# Altium PCB ELECTRONIC LOAD.PcbDoc
Units mil, origin at the board's own origin, x right, y up, seen from the top; angles counter-clockwise.
Board outline 2325 x 1595 mil, 2 copper layers (Top Layer, Bottom Layer); 45 components, 30 nets, 137 pads, 25 vias.
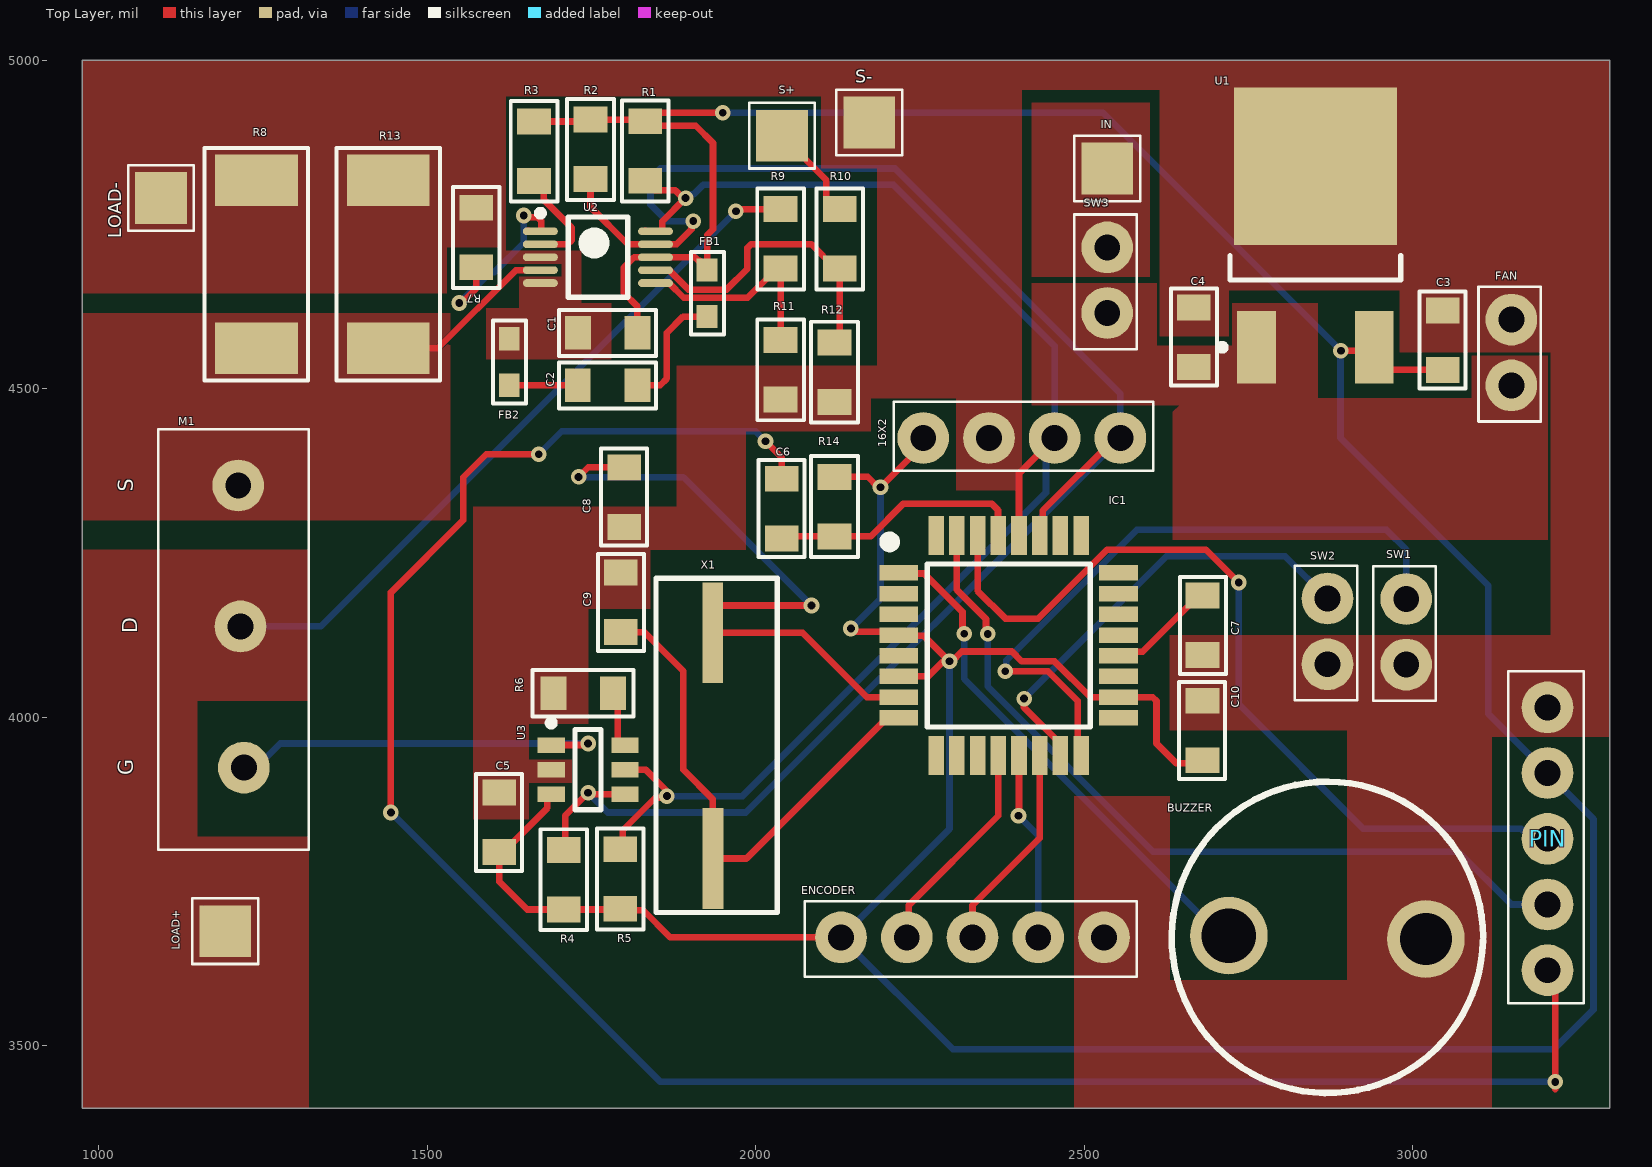
[diagram p0: Top Layer view]
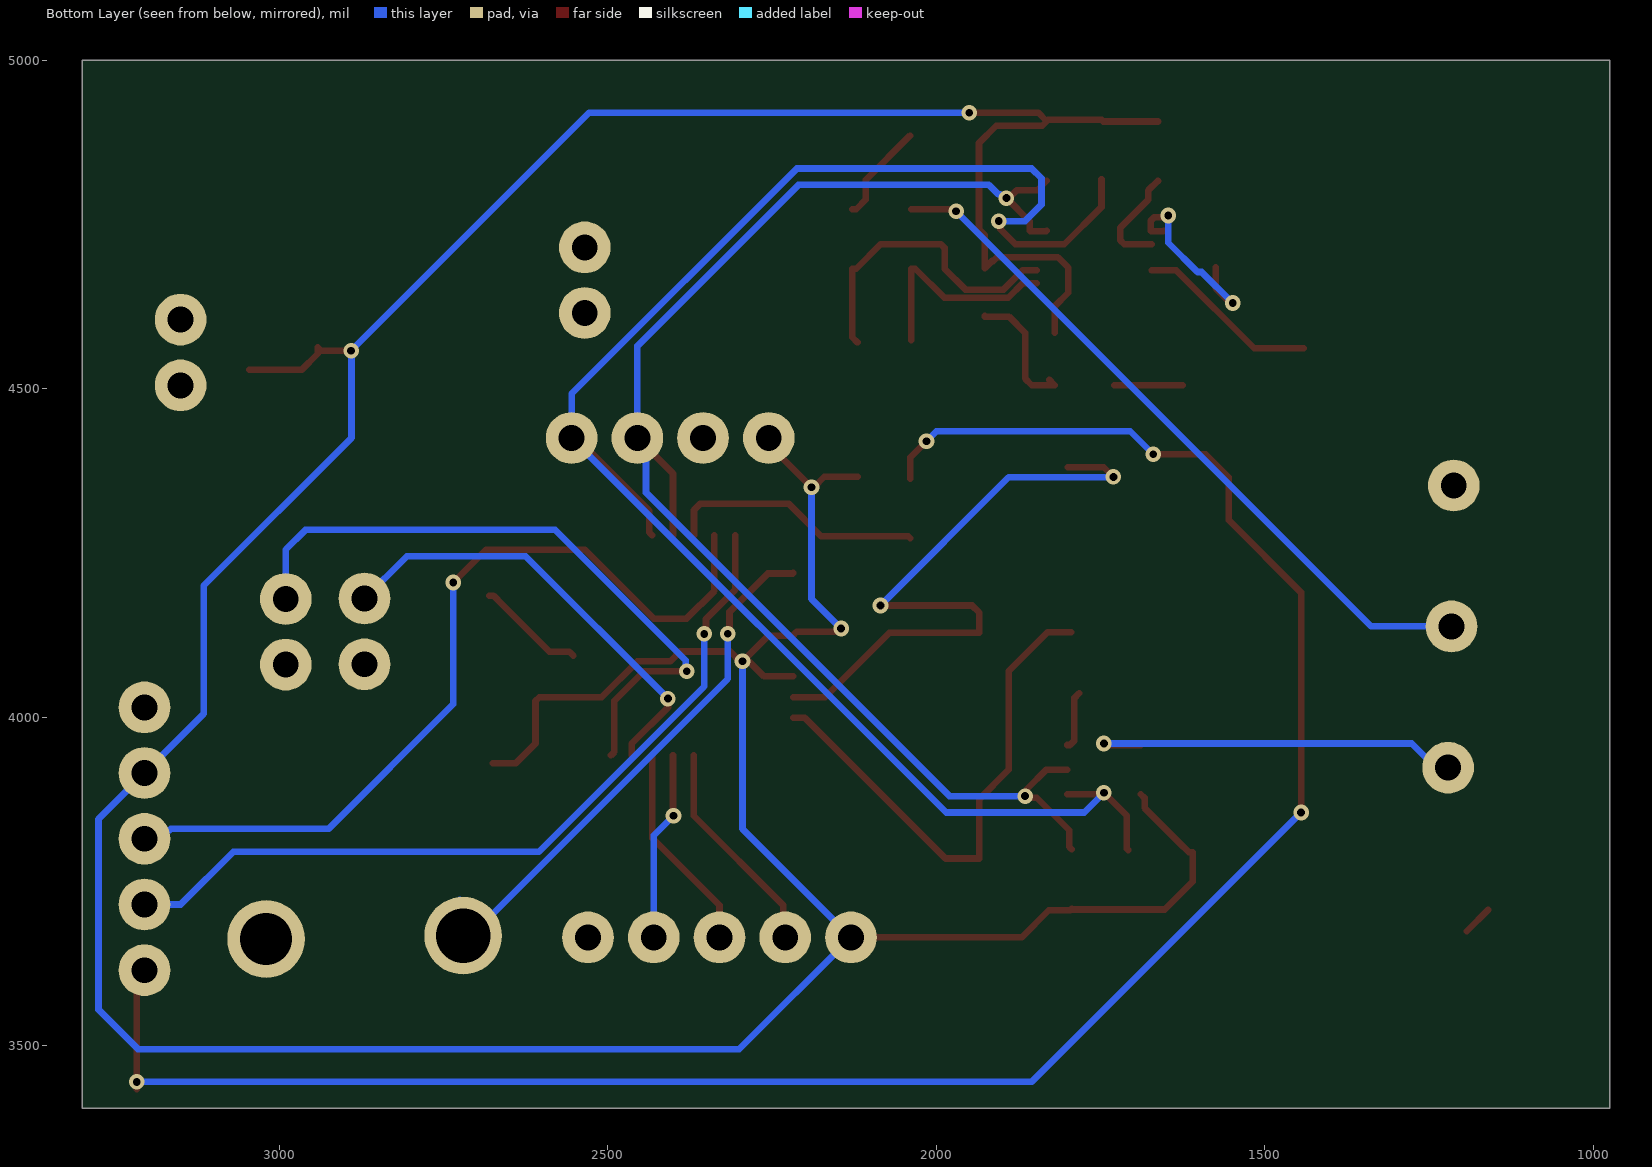
[diagram p1: Bottom Layer view, seen from below]
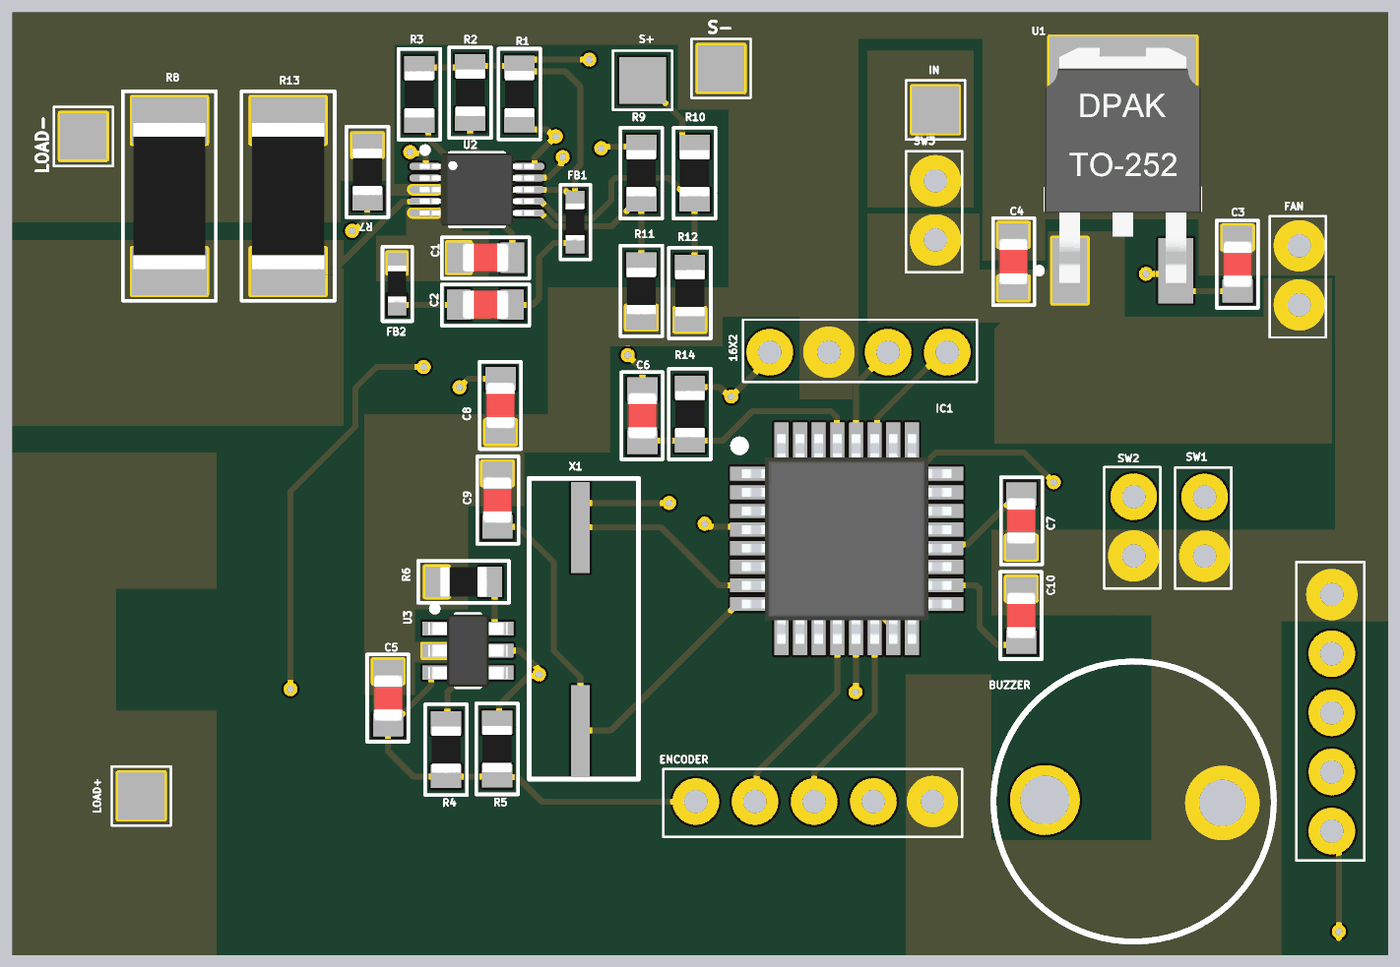
[diagram p2: 3D render of the assembled board from above, using the file's embedded part models]

## Layer stack, top to bottom
Top Solder: solder mask 0.4, Solder Resist, Dk 3.5
Top Layer: signal copper 1.4
Dielectric 1: dielectric 12.6, FR-4, Dk 4.8
Bottom Layer: signal copper 1.4
Bottom Solder: solder mask 0.4, Solder Resist, Dk 3.5

## Board outline
975,3405 975,5000 3300,5000 3300,3405

## Design rules (kind name [scope] priority, off if disabled: settings)
Clearance [All] p1: gap=0.1 ignorepadtopadclearanceinfootprint=FALSE
PolygonConnect [All] p1: connectstyle=Direct reliefconductorwidth=10 reliefentries=4 polygonreliefangle="90 Angle" airgapwidth=10
RoutingVias [All] p1: holewidth=28 width=50 viastyle="Through Hole" minholewidth=28 minwidth=50 maxholewidth=28 maxwidth=50
SolderMaskExpansion [All] p1: expansion=4 istentingtop=FALSE
Width [All] p1: maxlimit=10 minlimit=10 preferedwidth=10
30 further rules are at their usual default settings.

## Components (designator, comment, footprint, x,y, rotation, side; value= is the part's Value field where it differs from the comment)
16X2 "16X2" 4PIN 2415,4425 r270 top
BUZZER "BUZZER" BUZZER 2870,3665 r0 top
C1 "1UF" C-0805W 1774.72,4585 r0 top
C2 "1UF" C-0805W 1774.67,4505.26 r0 top
C3 "1UF" C-0805W 3045.72,4573.82 r270 top
C4 "1UF" C-0805W 2666.78,4578.26 r90 top
C5 "1UF" C-0805W 1610,3840 r270 top
C6 "100N" C-0805W 2039.76,4317.5 r270 top
C7 "100N" C-0805W 2680,4139.72 r90 top
C8 "16PF" C-0805W 1800,4335 r270 top
C9 "16PF" C-0805W 1794.74,4174.87 r90 top
C10 "100N" C-0805W 2680,3979.72 r270 top
ENCODER "ENCODER" 5PIN 2395,3660 r90 top
FAN "SWITCH" 2PIN 3150,4555 r0 top
FB1 "FB" R-0603W 1926.09,4645.11 r90 top
FB2 "FB" R-0603W 1625,4540.43 r90 top
IC1 "ATMEGA328-AUR" ATMEGA328 2390,4125 r0 top
IN "PAD" PAD 2535,4835 r180 top
LOAD+ "PAD" PAD 1192.86,3674.4 r180 top
LOAD- "PAD" PAD 1095,4790 r180 top
M1 "IRFP064NPBF" TO247 -42488.78,47748.2 r180 top
PIN "PIN" 5PIN 3200,3750 r0 top
R1 "10K" R-0805W 1831.93,4861.68 r90 top
R2 "10K" R-0805W 1748.69,4864.03 r90 top
R3 "10K" R-0805W 1662.76,4861.26 r90 top
R4 "10K" R-0805W 1707.89,3752.7 r270 top
R5 "10K" R-0805W 1794.17,3753.83 r270 top
R6 "10K" R-0805W 1737.53,4036.51 r0 top
R7 "10K" R-0805W 1575,4730 r270 top
R8 "2512W" R-2512W 1240.27,4689.26 r90 top
R9 "100K" R-0805W 2037.9,4727.83 r90 top
R10 "100K" R-0805W 2127.9,4727.83 r90 top
R11 "10K" R-0805W 2037.9,4528.69 r90 top
R12 "10K" R-0805W 2120,4525 r90 top
R13 "2512W" R-2512W 1440.93,4689.26 r90 top
R14 "10K" R-0805W 2120,4320.49 r90 top
S+ "PAD" PAD 2040,4885 r270 top
S- "PAD" PAD 2172.82,4905 r270 top
SW1 "SWITCH" 2PIN 2990,4130 r0 top
SW2 "SWITCH" 2PIN 2870.2,4130.53 r0 top
SW3 "SWITCH" 2PIN 2535,4665 r0 top
U1 "LM7805" TO-252 2851.78,4720.43 r90 top
U2 "ADS1115" ADS1115 1760,4700 r0 top
U3 "MCP4725" sot23-6 1745,3920.26 r0 top
X1 "16MHZ" "16MHZ CRYSTAL" 1935.16,3957.52 r270 top

## Footprints (in the part's own frame and the unit in brackets; to place one, negate y for a bottom-side part, rotate by r counter-clockwise, add the part's x,y. Pads: shape width x height; smd on the part's side, far side on the other; paste and mask are expansions set on the pad)
2PIN [mm]
  round 2 hole 1: 1(0,-1.27) 2(0,1.27)
  silkscreen extent -1.27,-2.67 1.14,2.54
4PIN [mm]
  round 2 hole 1: 1(0,-4.064) 2(0,-1.524) 3(0,1.016) 4(0,3.556)
  silkscreen extent -1.4,-5.21 1.27,4.83
5PIN [mm]
  round 2 hole 1: 1(0.127,-3.429) 2(0.127,-0.889) 3(0.127,1.651) 4(0.127,4.191) 5(0.127,6.731)
  silkscreen extent -1.4,-4.7 1.52,8.13
"16MHZ CRYSTAL" [mm]
  rect 3.9x0.8 smd: 1(-4.344,-0.008) 2(4.382,-0.004)
  silkscreen extent -6.45,-2.2 6.47,2.48
ADS1115 [mm] "TSSOP, 10-Leads, Body 3,00x3,00mm, Pitch 0,50mm, IPC Medium Density"
  oval 1.35x0.3 smd: 1(-2.225,1) 2(-2.225,0.5) 3(-2.225,0) 4(-2.225,-0.5) 5(-2.225,-1) 6(2.225,-1) 7(2.225,-0.5) 8(2.225,0) 9(2.225,0.5) 10(2.225,1)
  silkscreen extent -2.35,-1.55 1.15,1.82, body extent -2.45,-1.55 2.45,1.55, height 1.1
ATMEGA328 [mm]
  rect 1.5x0.6 smd: 1(-4.377,2.4) 2(-4.377,1.6) 3(-4.377,0.8) 4(-4.377,0) 5(-4.377,-0.8) 6(-4.377,-1.6) 7(-4.377,-2.4) 8(-4.377,-3.2) 17(4.123,-3.2) 18(4.123,-2.4) 19(4.123,-1.6) 20(4.123,-0.8) 21(4.123,0) 22(4.123,0.8) 23(4.123,1.6) 24(4.123,2.4)
  rect 0.6x1.5 smd: 9(-2.927,-4.65) 10(-2.127,-4.65) 11(-1.327,-4.65) 12(-0.527,-4.65) 13(0.273,-4.65) 14(1.073,-4.65) 15(1.873,-4.65) 16(2.673,-4.65) 25(2.673,3.85) 26(1.873,3.85) 27(1.073,3.85) 28(0.273,3.85) 29(-0.527,3.85) 30(-1.327,3.85) 31(-2.127,3.85) 32(-2.927,3.85)
  silkscreen extent -4.93,-3.55 3.02,3.8, body extent -4.63,-4.9 4.37,4.1, height 1.2
BUZZER [mm]
  round 3 hole 2.1: 1(-3.81,0.064)
  round 3 hole 2: 2(3.81,-0.064)
  silkscreen extent -6.02,-6.02 6.02,6.02
C-0805W [mm] "capacitor 0805 wave soldering"
  rect 1x1.3 smd: 1(-1.15,0) 2(1.15,0)
  silkscreen extent -1.88,-0.9 1.88,0.87, body extent -1,-0.63 1,0.63, height 0.78
PAD [mm]
  rect 2x2 smd: 1(0,0)
  silkscreen extent -1.27,-1.27 1.27,1.27
R-0603W [mm] "resistor 0603 wave soldering"
  rect 0.9x0.8 smd: 1(-0.9,0) 2(0.9,0)
  silkscreen extent -1.6,-0.65 1.6,0.63, body extent -0.8,-0.4 0.8,0.4, height 0.45
R-0805W [mm] "resistor 0805 wave soldering"
  rect 1x1.3 smd: 1(-1.15,0) 2(1.15,0)
  silkscreen extent -1.95,-0.9 1.95,0.9, body extent -1,-0.62 1,0.63, height 0.5
R-2512W [mm] "resistor 2512 wave soldering"
  rect 2x3.2 smd: 1(-3.25,0) 2(3.25,0)
  silkscreen extent -4.5,-2 4.5,2, body extent -3.15,-1.55 3.15,1.55, height 0.55
sot23-6 [mm] "SOT23, 6-Leads, Body 2,90x2,70mm, Pitch 0,95mm, IPC Medium Density"
  rect 1.05x0.6 smd: 1(-1.425,0.95) 2(-1.425,0) 3(-1.425,-0.95) 4(1.425,-0.95) 5(1.425,0) 6(1.425,0.95)
  silkscreen extent -1.55,-1.55 0.5,1.92, body extent -1.7,-1.55 1.7,1.55, height 1.45
TO247 [mm]
  round 2 hole 1: 1(-1110.234,1113.155) 2(-1110.107,1107.694) 3(-1110.016,1102.244)
  silkscreen extent -1112.74,1100.07 -1106.93,1116.33
TO-252 [mm]
  rect 2.8x1.5 smd: 1(-4,2.275) 3(-4,-2.275)
  rect 6.1x6.3 smd: 2(3,0)
  silkscreen extent -4.12,-3.3 -0.45,3.72, body extent -4.52,-3.37 5.58,3.37, height 2.41

## Part data
16X2: library part 4PIN
BUZZER: "YX-YT12075-YT03D"
C1 C2 C3 C4 C5: library part "1UF CAPACITOR", "0603 CAPACITOR"
C6 C7 C10: library part "100N CAPACITOR"
ENCODER: library part 5PIN
FAN SW1 SW2 SW3: library part 2PIN
FB1 FB2: library part LCB1608-152Y-N
IC1: Manufacturer_Name=Microchip, Mouser Part Number=556-ATMEGA328-AUR, Arrow Part Number=ATMEGA328-AUR, Arrow Price/Stock=https://www.arrow.com/en/products/atmega328-aur/microchip-technology, Datasheet Link=https://componentsearchengine.com/Datasheets/1/ATMEGA328-AUR.pdf, Height=1.2mm, Manufacturer_Part_Number=ATMEGA328-AUR, Mouser Price/Stock=https://www.mouser.co.uk/ProductDetail/Microchip-Technology-Atmel/ATMEGA328-AUR/?qs=lwdSMh1%2FoYLfe%252B5OKFEFrw%3D%3D
M1: "TO247"
PIN: library part PIN5
R1 R2 R3 R4 R5 R6 R7 R11 R12 R14: library part "10K RESISTOR"
R8 R13: library part "2512W RESISTOR"
U3: "SOT23-6"

## Via types
v1: diameter 23.62, hole 11.81, Top Layer to Bottom Layer, 25 vias

## Nets (pads, with @x,y where several pads share a name; then routed paths per layer and width w, separated by ;. In a path a pad name is that pad's centre, name@x,y a point inside that pad or via, vN(x,y) a via of type N, cw(c..) or ccw(c..) an arc to the next point about the centre after c; other vN are vias at no path point)
5V: 16X2.1 C1.2 C3.2 C5.2 C10.2 ENCODER.5 FB1.2 IC1.4 IC1.6 IC1.18 PIN.4 R1.2 R2.2 R3.2 R4.2 R5.2 R14.2 U1.3 U2.8 U3.3 | length 6902.3
  Top Layer w10: R3.2 1745.92,4906.54 R2.2 1829.57,4909.31 R1.2 ; U3.3 1683.09,3877.05 1683.09,3861.91 1630.59,3809.41 1615.91,3794.72 C5.2 1610,3750 1652.57,3707.43 R4.2 1793.04,3707.43 R5.2 1796.61,3706.1 1828.9,3706.1 1870,3665 ENCODER.5 ; C1.2 1820,4625 1799.14,4645.86 1799.14,4684.14 1815,4700 1907.61,4700 1913.37,4694.24 1915.34,4694.24 1926.09,4683.49 1926.09,4733.52 1935.1,4742.53 1935.1,4873.8 1908.9,4900 1838.88,4900 R1.2 ; v1(1950,4920) 1844.98,4920 R1.2 ; R14.2 2170.55,4365.77 2186.31,4350 v1(2190,4350) 2255,4415 16X2.1 ; v1(2145,4135) 2150,4130 2212.68,4130 2219.02,4123.65 2256.35,4123.65 v1(2295,4085) ; IC1.6 2262.2,4062.01 2285.2,4085 v1(2295,4085) ; C10.2@2674.99,3929.73 2640.27,3929.73 2610,3960 2610,4024.65 2604.14,4030.51 IC1.18 2509.49,4030.51 2455,4085 2405,4085 2390,4100 2313.69,4100 2298.69,4085 v1(2295,4085) ; v1(2890.72,4557.63) 2936.03,4557.63 U1.3 2941.35,4553.07 2965.88,4528.54 C3.2
  Bottom Layer w10: v1(1950,4920) 2528.35,4920 v1(2890.72,4557.63) 2890,4556.9 2890,4425 3115,4200 3115,4005 PIN.4 3275,3845 3275,3555 3215,3495 2300,3495 ENCODER.5 2295,3830 v1(2295,4085) ; v1(2145,4135) 2190,4180 v1(2190,4350)
12V: C4.1 FAN.1 SW3.1 U1.1
GND: 16X2.2 BUZZER.2 C1.1 C3.1 C4.2 C5.1 C7.1 C8.2 C9.2 C10.1 ENCODER.1 FAN.2 FB2.2 LOAD-.1 PIN.5 R6.1 R7.1 R8.2 R11.1 R12.1 R13.2 S-.1 SW1.1 SW2.1 U1.2 U2.3 U2.5 U3.2
Net16X2_3: 16X2.3 IC1.28 R1.1 R5.1 U2.10 U3.5 | length 2206.7
  Top Layer w10: R5.1 1797.78,3802.71 1797.78,3827.93 1847.24,3877.39 1862.39,3877.39 v1(1865,3880) 1862.39,3882.61 1862.39,3890.33 1832.46,3920.26 U3.5 ; U2.10@1831.93,4740.21 1832.76,4739.37 1856.89,4739.37 1857.73,4740.21 1857.73,4754.42 v1(1893.33,4790.02) 1889.64,4790.02 1877.94,4801.71 1846.61,4801.71 R1.1 ; IC1.28 2400.75,4370.75 16X2.3
  Bottom Layer w10: v1(1865,3880) 1980,3880 2441.85,4341.85 2441.85,4411.85 16X2.3 2455,4565 2210,4810 1920,4810 1905.63,4795.63 1902.63,4795.63 1897.01,4790.02 v1(1893.33,4790.02)
Net16X2_4: 16X2.4 IC1.27 R2.1 R4.1 U2.9 U3.4 | length 2710
  Top Layer w10: R4.1 1710,3800.09 1710,3850 v1(1745,3885) 1747.14,3882.86 U3.4 ; R2.1 1748.69,4776.31 1805.31,4719.69 U2.9 1847.94,4720.03 1880.03,4720.03 1902.39,4742.39 1902.39,4752.39 v1(1905,4755) ; IC1.27 2436.92,4281.26 2436.92,4314.45 2547.48,4425 16X2.4
  Bottom Layer w10: v1(1745,3885) 1775,3855 1985,3855 16X2.4 2555,4492.12 2212.12,4835 1855,4835 1840,4820 1840,4780 1865,4755 v1(1905,4755)
NetBUZZER_1: BUZZER.1 IC1.1 | length 858.7
  Top Layer w10: IC1.1 2218.51,4218.65 2256.35,4218.65 2314.74,4160.26 2314.74,4129.57 v1(2317.35,4126.96)
  Bottom Layer w10: v1(2317.35,4126.96) 2317.35,4058.37 2708.22,3667.5 BUZZER.1 ; BUZZER.1@2720,3655 2725,3660 BUZZER.1@2725,3722.5
NetC2_1: C2.1 FB2.1 | length 104.5
  Top Layer w10: FB2.1 1625.26,4505.26 C2.1
NetC2_2: C2.2 FB1.1 | length 203.5
  Top Layer w10: C2.2@1828.45,4513.77 C2.2 1854.74,4505.26 1865,4515.52 1865,4585 1889.67,4609.67 FB1.1@1925.1,4609.67 ; FB1.1 FB1.1@1925.1,4609.67 ; FB1.1@1926.09,4610.66 FB1.1@1925.1,4609.67
NetC6_1: C6.1 PIN.1 | length 3245.8
  Top Layer w10: v1(1445,3855) 1445,4190 1555,4300 1555,4365 1590,4400 v1(1670,4400) ; v1(2015,4420) 2039.76,4395.24 C6.1 ; PIN.1 3216.95,3603.05 v1(3216.95,3445) v1@3216.95,3434.14
  Bottom Layer w10: v1(1445,3855) 1855,3445 v1(3216.95,3445) ; v1(1670,4400) 1705,4435 2000,4435 v1(2015,4420)
NetC6_2: C6.2 IC1.29 R14.1 | length 393.8
  Top Layer w10: C6.2 2042.75,4275.22 R14.1 2175.22,4275.22 2225,4325 2358.99,4325 2368.75,4315.24 2368.75,4277.08 IC1.29
NetC7_2: C7.2 IC1.20 | length 165.6
  Top Layer w10: IC1.20 2558.46,4099.64 2588.74,4099.64 2659.41,4170.31 2674.09,4185 C7.2
NetC8_1: C8.1 IC1.7 X1.1 | length 1019.6
  Top Layer w10: v1(1730.59,4365.59) 1745.28,4380.28 C8.1 ; v1(2085,4170) 1945.61,4170 1934.87,4159.25 X1.1 2071.44,4128.56 2169.49,4030.51 IC1.7
  Bottom Layer w10: v1(1730.59,4365.59) 1731.18,4365 1890,4365 v1(2085,4170)
NetC9_1: C9.1 IC1.8 X1.2 | length 794.9
  Top Layer w10: C9.1 1830.41,4129.59 1890,4070 1890,3920 1935,3875 X1.2 1985.94,3785 2199.96,3999.02 IC1.8
NetENCODER_2: ENCODER.2 IC1.13 | length 289.7
  Top Layer w10: v1(2400,3850) 2400.75,3850.75 IC1.13
  Bottom Layer w10: v1(2400,3850) 2430,3820 ENCODER.2
NetENCODER_3: ENCODER.3 IC1.14 | length 319.3
  Top Layer w10: ENCODER.3 2330,3713.91 2432.24,3816.15 IC1.14
NetENCODER_4: ENCODER.4 IC1.12 | length 334.6
  Top Layer w10: ENCODER.4 2232.82,3667.82 2232.82,3713.51 2369.25,3849.94 IC1.12
NetLOAD+_1: LOAD+.1 M1.2 R9.2 | length 1131.1
  Top Layer w10: LOAD+.1@1160,3707.26 LOAD+.1 ; v1(1970,4770) 1973.11,4773.11 R9.2
  Bottom Layer w10: M1.2 1338.2,4138.2 v1(1970,4770)
NetM1_1: M1.1 U3.1 | length 596.1
  Top Layer w10: U3.1 1742.66,3957.66 v1(1745,3960)
  Bottom Layer w10: M1.1 1239.81,3923.2 1276.62,3960 v1(1745,3960)
NetM1_3: M1.3 R8.1 R13.1 U2.4 | length 280.8
  Top Layer w10: R13.1 1516.31,4561.31 1634.97,4679.97 1672.06,4679.97 U2.4
NetPIN_2: IC1.31 PIN.2 | length 1238.5
  Top Layer w10: IC1.31 2306.26,4193.74 2350.58,4149.42 2350.58,4129.33 v1(2353.19,4126.73)
  Bottom Layer w10: v1(2353.19,4126.73) 2353.19,4046.81 2605,3795 3070,3795 3150,3715 PIN.2
NetPIN_3: IC1.30 PIN.3 | length 1303.2
  Top Layer w10: IC1.30 2337.76,4192.24 2380,4150 2430,4150 2535,4255 2685,4255 v1(2735,4205)
  Bottom Layer w10: v1(2735,4205) 2735,4020 2925,3830 3164.77,3830 3166.62,3828.15 3191.85,3828.15 PIN.3
NetR3_1: R3.1 U2.2 | length 164.4
  Top Layer w10: R3.1 1663.15,4815.99 1677.84,4801.3 1677.84,4787.16 1720,4745 1720,4725.54 1714.14,4719.69 U2.2
NetR6_2: R6.2 U3.6 | length 88.9
  Top Layer w10: R6.2 1790,4029.32 1790,3964.47 1796.81,3957.66 U3.6
NetR7_2: R7.2 U2.1 | length 314.6
  Top Layer w10: v1(1549.12,4630.3) 1552.8,4630.3 1575,4652.5 R7.2 ; v1@1647.13,4759.78 v1(1647.13,4763.46) 1649.53,4761.06 1668.08,4761.06 1673.94,4755.2 1673.94,4740.21 1673.1,4739.37 U2.1 1654.43,4739.37 U2.1@1653.59,4740.21
  Bottom Layer w10: v1(1549.12,4630.3) 1596.33,4677.52 1602.52,4677.52 1647.13,4722.13 v1(1647.13,4763.46)
NetR9_1: R9.1 R11.2 U2.6 | length 326.5
  Top Layer w10: U2.6 1868.27,4660.63 1890.66,4638.23 1987.67,4638.23 2031.99,4682.55 R9.1 R11.2
NetR10_1: R10.1 R12.2 U2.7 | length 470.8
  Top Layer w10: U2.7 1868.27,4680.31 1897.8,4650.78 1955.78,4650.78 1987.47,4682.47 1987.47,4714.14 1993.33,4720 2084.55,4720 2121.99,4682.55 R10.1 2127.9,4578.17 R12.2
NetR10_2: R10.2 S+.1 | length 151.8
  Top Layer w10: S+.1 2107.31,4817.69 2107.31,4787.79 2121.99,4773.11 R10.2
NetSW1_2: IC1.16 SW1.2 | length 1009.1
  Top Layer w10: v1(2380,4070) 2445,4070 2490,4025 2490,3947.17 IC1.16
  Bottom Layer w10: v1(2380,4070) 2381.46,4071.46 2381.46,4086.46 2481.3,4186.3 2580,4285 2960,4285 2990,4255 SW1.2
NetSW2_2: IC1.15 SW2.2 | length 687.6
  Top Layer w10: v1(2408.39,4028.39) 2408.39,4015 2463.74,3959.65 IC1.15
  Bottom Layer w10: v1(2408.39,4028.39) 2625,4245 2805.73,4245 SW2.2
NetSW3_2: IN.1 SW3.2 | length 18.6
  Top Layer w10: SW3.2 SW3.2@2535,4733.6
pads on no net: IC1.2 IC1.3 IC1.5 IC1.9 IC1.10 IC1.11 IC1.17 IC1.19 IC1.21 IC1.22 IC1.23 IC1.24 IC1.25 IC1.26 IC1.32

## Polygon pours and split planes (outlines as drawn)
12V on Top Layer "12V_L01_P002" (solid, pour order 2): 2645,4475 2635,4465 2635,4270 3205,4270 3205,4550 3090,4550 3090,4485 2855,4485 2855,4630 2725,4630 2725,4565 2610,4565 2610,4660 2420,4660 2420,4475
NetSW3_2 on Top Layer "NETSW3_2_L01_P004" (solid, pour order 4): 2420,4935 2600,4935 2600,4670 2420,4670
GND on Top Layer "GND_L01_P001" (solid, pour order 1): 1745,4165 1745,3990 1655,3990 1655,3935 1720,3935 1720,3900 1655,3900 1655,3845 1570,3845 1570,4320 1880,4320 1880,4535 2185,4535 2185,4835 2100,4835 2100,4945 1620,4945 1620,4710 1735,4710 1735,4630 1780,4630 1780,4545 1590,4545 1590,4622.28 1640,4622.28 1640,4670 1705,4670 1705,4690 1610,4690 1610,4715 1530,4715 1530,4645 975,4645 975,5000 3300,5000 3300,3970 3120,3970 3120,3590 3120,3405 2485,3405 2485,3880 2630,3880 2630,3600 2900,3600 2900,3980 2630,3980 2630,4125 3210,4125 3210,4555 2980,4555 2980,4650 2720,4650 2720,4580 2615,4580 2615,4835 2615,4955 2405,4955 2405,4345 2305,4345 2305,4485 2175,4485 2175,4435 1985,4435 1985,4255 1840,4255 1840,4165
NetLOAD+_1 on Top Layer "NETLOAD+_1_L01_P003" (solid, pour order 3): 1150,4025 1320,4025 1320,4255 975,4255 975,3405 1320,3405 1320,3818.43 1150,3818.43
NetM1_3 on Top Layer "NETM1_3_L01_P000" (solid, pour order 0): 975,4615 1535,4615 1535,4300 975,4300

## Silkscreen, mask and mechanical layers (free items; w line width, h text height)
Mechanical 1:
  the board outline again, w10

## Text inside footprints (layer, text, board x,y; h text height)
M1: Top Overlay "G" at 1060.79,3911.53 h39.37 r90; Top Overlay "D" at 1066.22,4127.79 h39.37 r90; Top Overlay "S" at 1060.79,4343.19 h39.37 r90